# Altium PCB DRV8825.PcbDoc
Units mm, origin at the board's own origin, x right, y up, seen from the top; angles counter-clockwise.
Board outline 52.23 x 53.78 mm, 2 copper layers (Top Layer, Bottom Layer); 7 components, 13 nets, 37 pads, 4 vias.
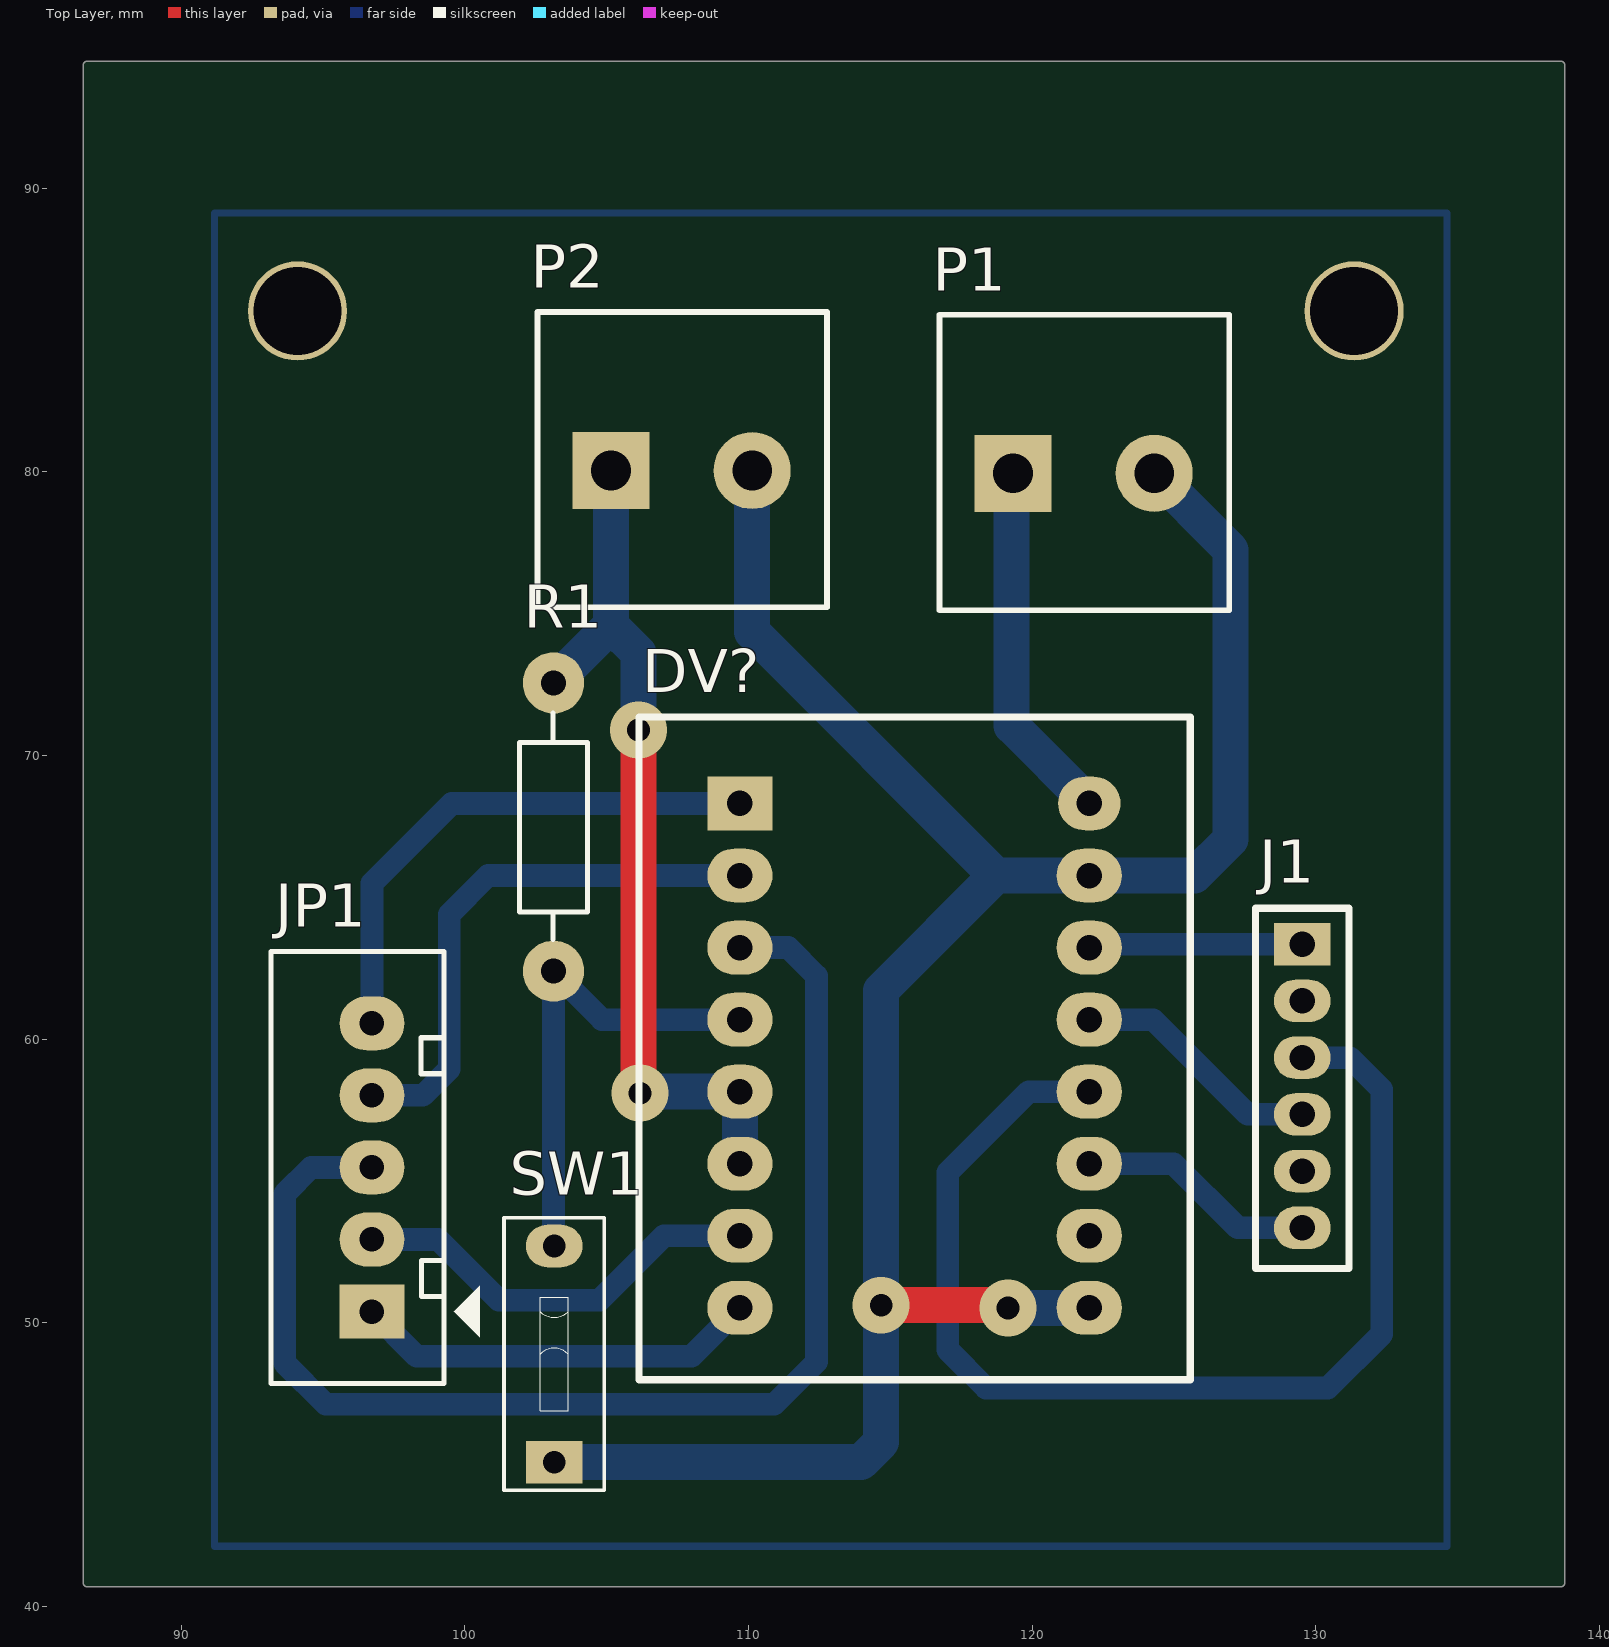
[diagram p0: Top Layer view]
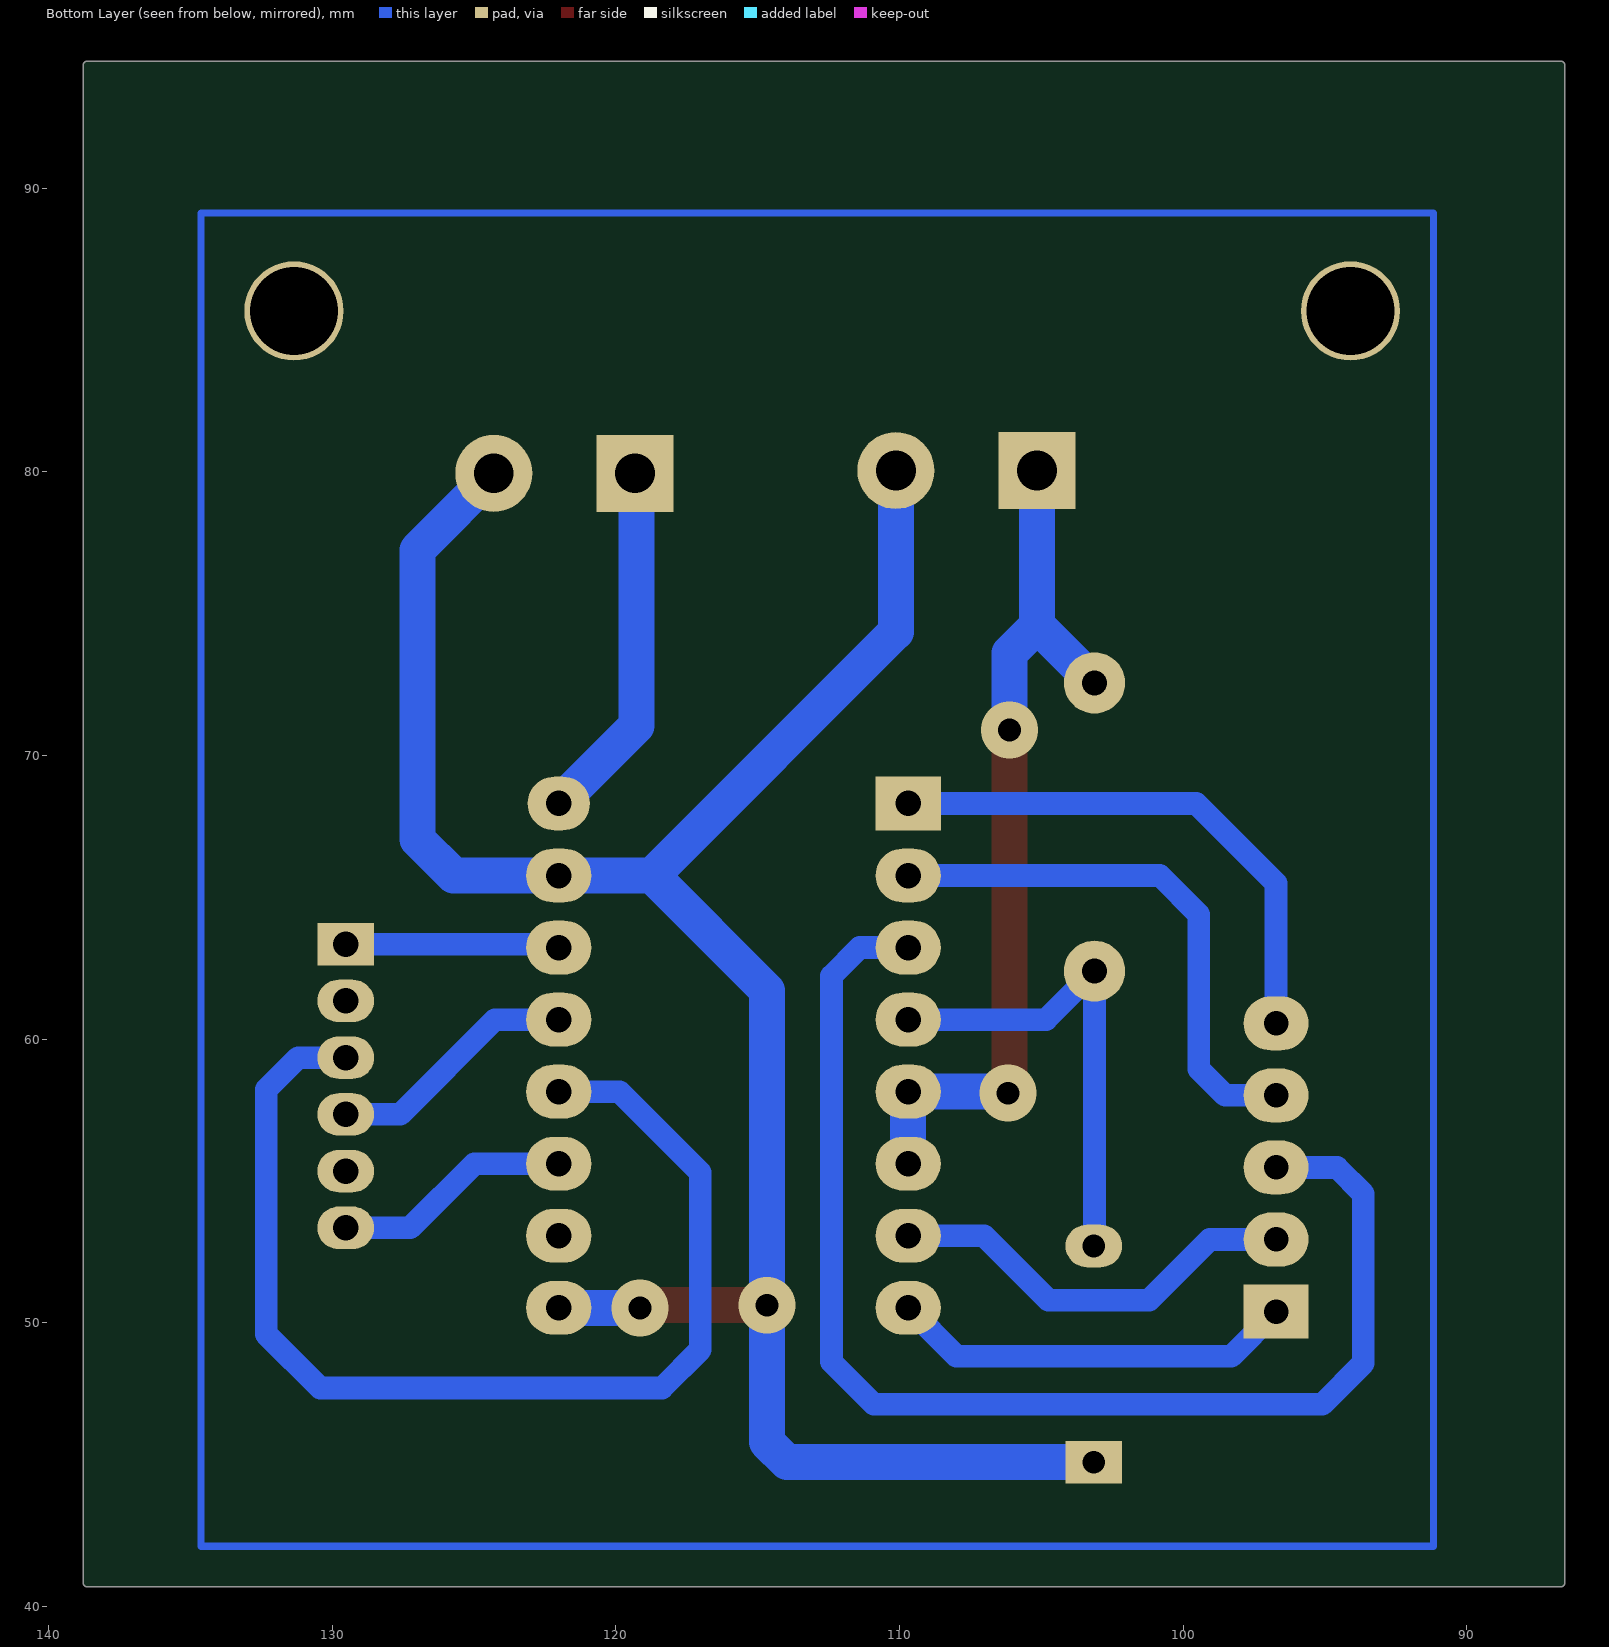
[diagram p1: Bottom Layer view, seen from below]
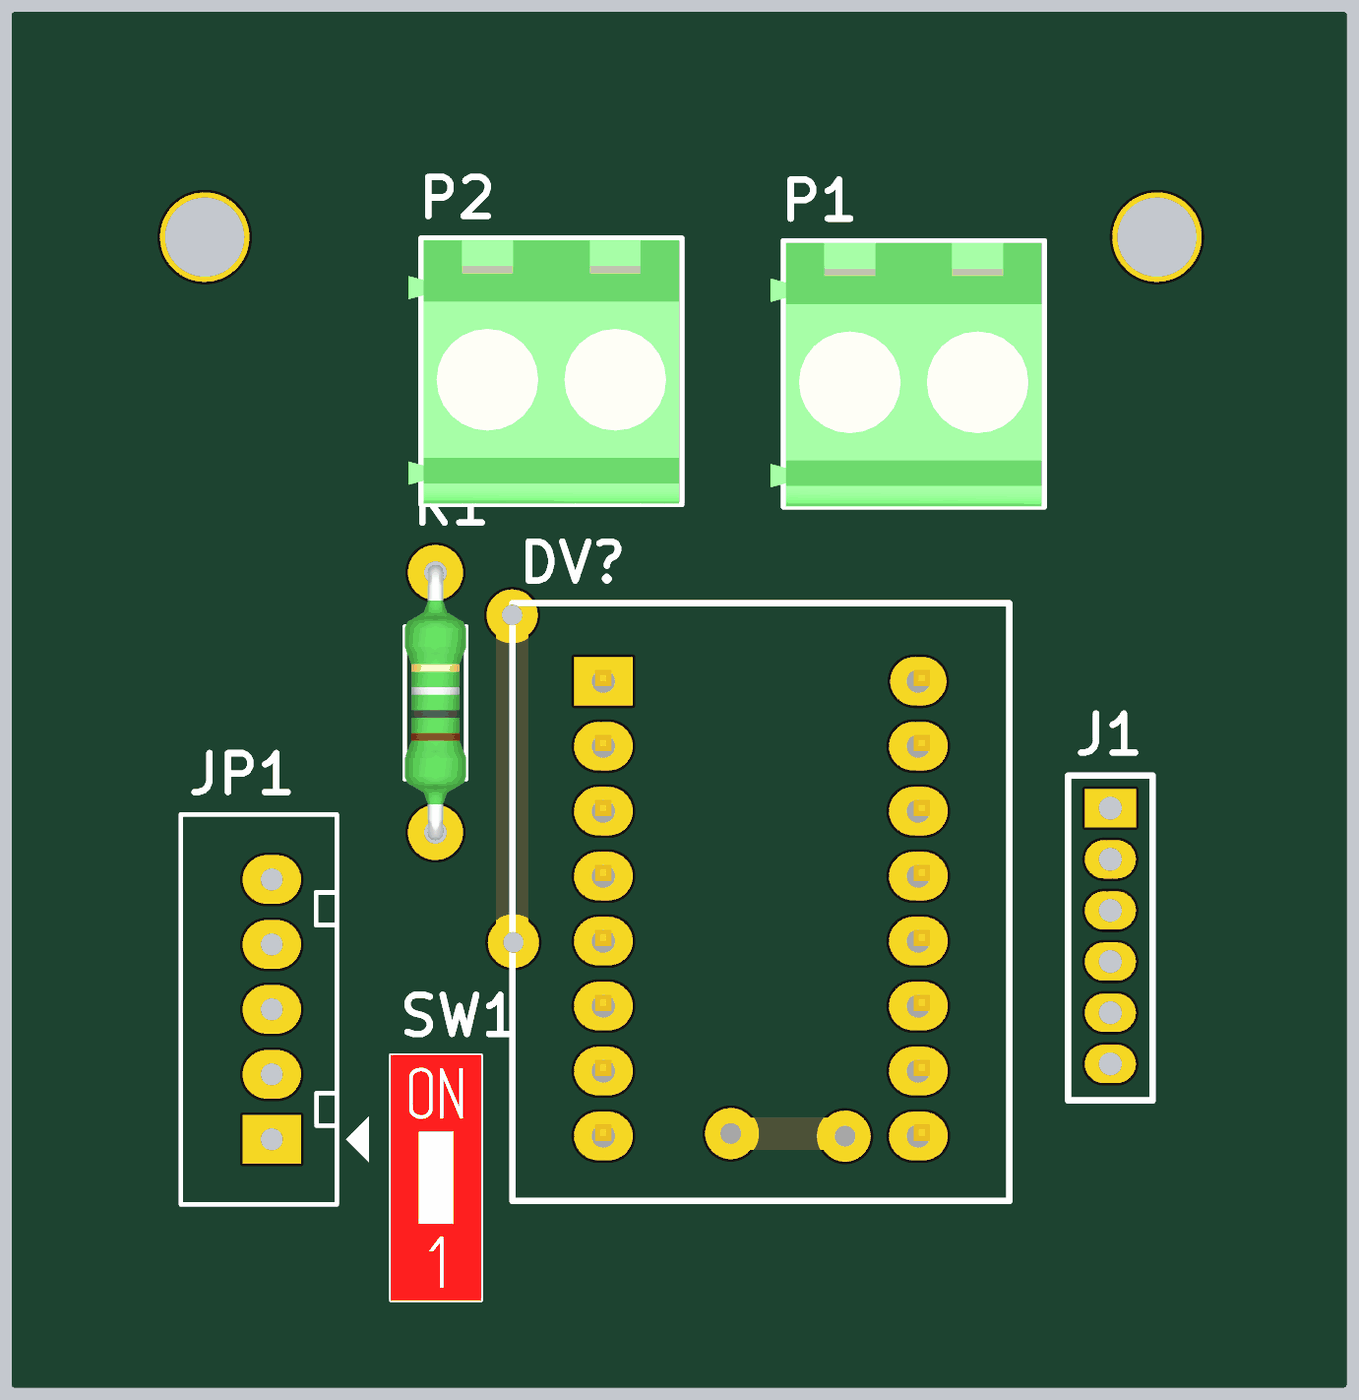
[diagram p2: 3D render of the assembled board from above, using the file's embedded part models]

## Layer stack, top to bottom
Top Solder: solder mask 0.0102, Solder Resist, Dk 3.5
Top Layer: signal copper 0.0356
Dielectric 1: dielectric 0.32, FR-4, Dk 4.8
Bottom Layer: signal copper 0.0356
Bottom Solder: solder mask 0.0102, Solder Resist, Dk 3.5

## Board outline
86.548,40.825 ccw(c86.675,40.825) 86.675,40.698 138.65,40.698 ccw(c138.65,40.825) 138.777,40.825 138.777,94.35 ccw(c138.65,94.35) 138.65,94.477 86.675,94.477 ccw(c86.675,94.35) 86.548,94.35

## Design rules (kind name [scope] priority, off if disabled: settings)
Clearance [All] p1: gap=0.4
PolygonConnect [All] p1: connectstyle=Relief reliefconductorwidth=0.254 reliefentries=4 polygonreliefangle="90 Angle" airgapwidth=0.254
RoutingVias [All] p1: holewidth=0.711 width=1.27 viastyle="Through Hole" minholewidth=0.711 minwidth=1.27 maxholewidth=0.711 maxwidth=1.27
SolderMaskExpansion [All] p1: expansion=0.102
Width [All] p1: maxlimit=1.27 minlimit=0.254 preferedwidth=0.8
30 further rules are at their usual default settings.

## Components (designator, comment, footprint, x,y, rotation, side; value= is the part's Value field where it differs from the comment)
DV? "DRV8825 A4988" "DRV8825 A4988" 109.696,68.311 r0 top
J1 "Con6 - 2m" con6-2m 129.525,63.35 r270 top
JP1 "step motor" CON5 96.725,50.4 r90 top
P1 "JACK_12V" "TBlock 2" 119.325,79.95 r0 top
P2 "JACK_5V" "TBlock 2" 105.15,80.05 r0 top
R1 "10K" RES-1/4W 103,67.1 r270 top
SW1 "SW" SW-DIP1-1 103.15,48.9 r0 top

## Footprints (in the part's own frame and the unit in brackets; to place one, negate y for a bottom-side part, rotate by r counter-clockwise, add the part's x,y. Pads: shape width x height; smd on the part's side, far side on the other; paste and mask are expansions set on the pad)
CON5 [mil] "CON5"
  rect 75x90 hole 34: 1(0,0)
  oval 75x90 hole 34: 2(100,0) 3(200,0) 4(300,0) 5(400,0)
  silkscreen extent -100,-150 500,140
con6-2m [mm] "con6-2m"
  rect 1.5x2 hole 0.9: 1(0,0)
  oval 1.5x2 hole 0.9: 2(2,0) 3(4,0) 4(6,0) 5(8,0) 6(10,0)
  silkscreen extent -1.27,-1.65 11.43,1.65
"DRV8825 A4988" [mm] "DRV8825 A4988"
  rect 2.3x1.9 hole 0.9: 1(0,0)
  oval 2.3x1.9 hole 0.9: 2(0,-2.54) 3(0,-5.08) 4(0,-7.62) 5(0,-10.16) 6(0,-12.7) 7(0,-15.24) 8(0,-17.78) 9(12.319,-17.78) 10(12.319,-15.24) 11(12.319,-12.7) 12(12.319,-10.16) 13(12.319,-7.62) 14(12.319,-5.08) 15(12.319,-2.54)
  oval 2.2x1.9 hole 0.9: 16(12.319,0)
  silkscreen extent -3.56,-20.32 15.88,3.05, body extent -1.25,-18.92 13.7,1.4, height 4.84
RES-1/4W [mil]
  round 85 hole 35: 1(-215,5) 2(185,5)
  silkscreen extent -173,-42 141,52, body extent -227,-42 197,52, height 95
SW-DIP1-1 [mm] "01p, 2.54mm Pitch, Horizontal, Box Type, THT, flat Actuator, red, without Tape, Tube"
  rect 2x1.5 hole 0.8: 1(0,-3.81)
  oval 2x1.5 hole 0.8: 2(0,3.81)
  silkscreen extent -1.77,-4.8 1.77,4.8, body extent -1.77,-4.8 1.77,4.8, height 5.4
"TBlock 2" [mil] "Connector; Terminal; 2 Positions; Solder Pad 35mil"
  rect 107x107 hole 55.12: 1(0,0)
  round 107 hole 55.12: 2(196,0)
  silkscreen extent -102,-190 300,220, body extent -122,-189 296,217, height 560

## Part data
J1: library part "con6 - 2mm"
JP1: library part Con5, "Connector 5"
P1 P2: library part "Header 2", "Header, 2-Pin"
R1: library part Res, "Res"
SW1: library part SW2, "Switch button 2 pin"

## Free pads (board coordinates)
  round 3.5 hole 3.1: 2(94.1,85.675) 2(131.35,85.675)

## Via types
v1: diameter 2, hole 0.8, Top Layer to Bottom Layer, 4 vias

## Nets (pads, with @x,y where several pads share a name; then routed paths per layer and width w, separated by ;. In a path a pad name is that pad's centre, name@x,y a point inside that pad or via, vN(x,y) a via of type N, cw(c..) or ccw(c..) an arc to the next point about the centre after c; other vN are vias at no path point)
+5: DV?.5 DV?.6 P2.1 R1.1 | length 31.5
  Top Layer w1.27: v1@106.125,58.15 v1(106.125,70.9)
  Bottom Layer w1.27: R1.1 105.15,74.584 ; P2.1 105.15,74.584 ; v1(106.125,70.9) 106.125,73.609 105.15,74.584 ; v1(106.175,58.1) 106.1,58.1 106.049,58.151 DV?.5 DV?.6
+12: DV?.16 P1.1 | length 12.8
  Bottom Layer w1.27: P1.1@119.275,79.95 119.275,71.051 DV?.16
A1: DV?.12 J1.3 | length 41
  Bottom Layer w0.8: DV?.12 119.876,58.151 117.025,55.3 117.025,49.05 118.375,47.7 130.425,47.7 132.325,49.6 132.325,58.225 131.2,59.35 J1.3
A2: DV?.11 J1.6 | length 8.4
  Bottom Layer w0.8: DV?.11 124.989,55.611 127.25,53.35 J1.6
B1: DV?.13 J1.4 | length 8.9
  Bottom Layer w0.8: DV?.13 124.259,60.691 127.6,57.35 J1.4
B2: DV?.14 J1.1 | length 7.6
  Bottom Layer w0.8: DV?.14 122.134,63.35 J1.1
DIR: DV?.8 JP1.1 | length 14.3
  Bottom Layer w0.8: JP1.1 98.3,48.825 107.99,48.825 DV?.8
ENABLE: DV?.1 JP1.5 | length 19.1
  Bottom Layer w0.8: JP1.5 96.725,65.5 99.536,68.311 DV?.1
GND: DV?.9 DV?.15 P1.2 P2.2 SW1.1 | length 81.4
  Top Layer w1.27: v1(114.675,50.625) v1@119.05,50.625
  Bottom Layer w0.254: v1(119.15,50.525) v1@119.156,50.531
  Bottom Layer w1.27: SW1.1 113.965,45.09 114.675,45.8 v1(114.675,50.625) 114.675,61.725 118.721,65.771 ; P2.2 110.128,74.364 118.721,65.771 ; v1@119.156,50.531 DV?.9 ; P1.2 126.828,77.425 127,77.253 127,67.05 125.721,65.771 DV?.15 118.721,65.771
M0: DV?.2 JP1.4 | length 19.4
  Bottom Layer w0.8: JP1.4 98.52,58.02 99.45,58.95 99.45,64.4 100.821,65.771 DV?.2
M1: DV?.3 JP1.3 | length 46.1
  Bottom Layer w0.8: JP1.3 94.58,55.48 93.65,54.55 93.65,48.575 95.1,47.125 110.9,47.125 112.4,48.625 112.4,62.231 111.4,63.231 DV?.3
M2: DV?.4 R1.2 SW1.2 | length 17.2
  Bottom Layer w0.8: SW1.2 103.127,52.733 R1.2 104.837,60.691 DV?.4 DV?.4@109.527,60.86
STEP: DV?.7 JP1.2 | length 14.8
  Bottom Layer w0.8: JP1.2 99.06,52.94 101.2,50.8 104.75,50.8 107.021,53.071 DV?.7
pads on no net: DV?.10 J1.2 J1.5
copper on no net: | length 180.9
  Bottom Layer w0.254: 91.175,42.125 134.625,42.125 134.625,89.125 91.175,89.125 91.175,42.125